# Altium PCB PCB_skinBot_master_v4.PcbDoc
Units mm, origin at the board's own origin, x right, y up, seen from the top; angles counter-clockwise.
Board outline 110.24 x 110.24 mm, 2 copper layers (Top Layer, Bottom Layer); 60 components, 70 nets, 314 pads, 0 vias.
Unrouted connection lines stored in the file: 189.
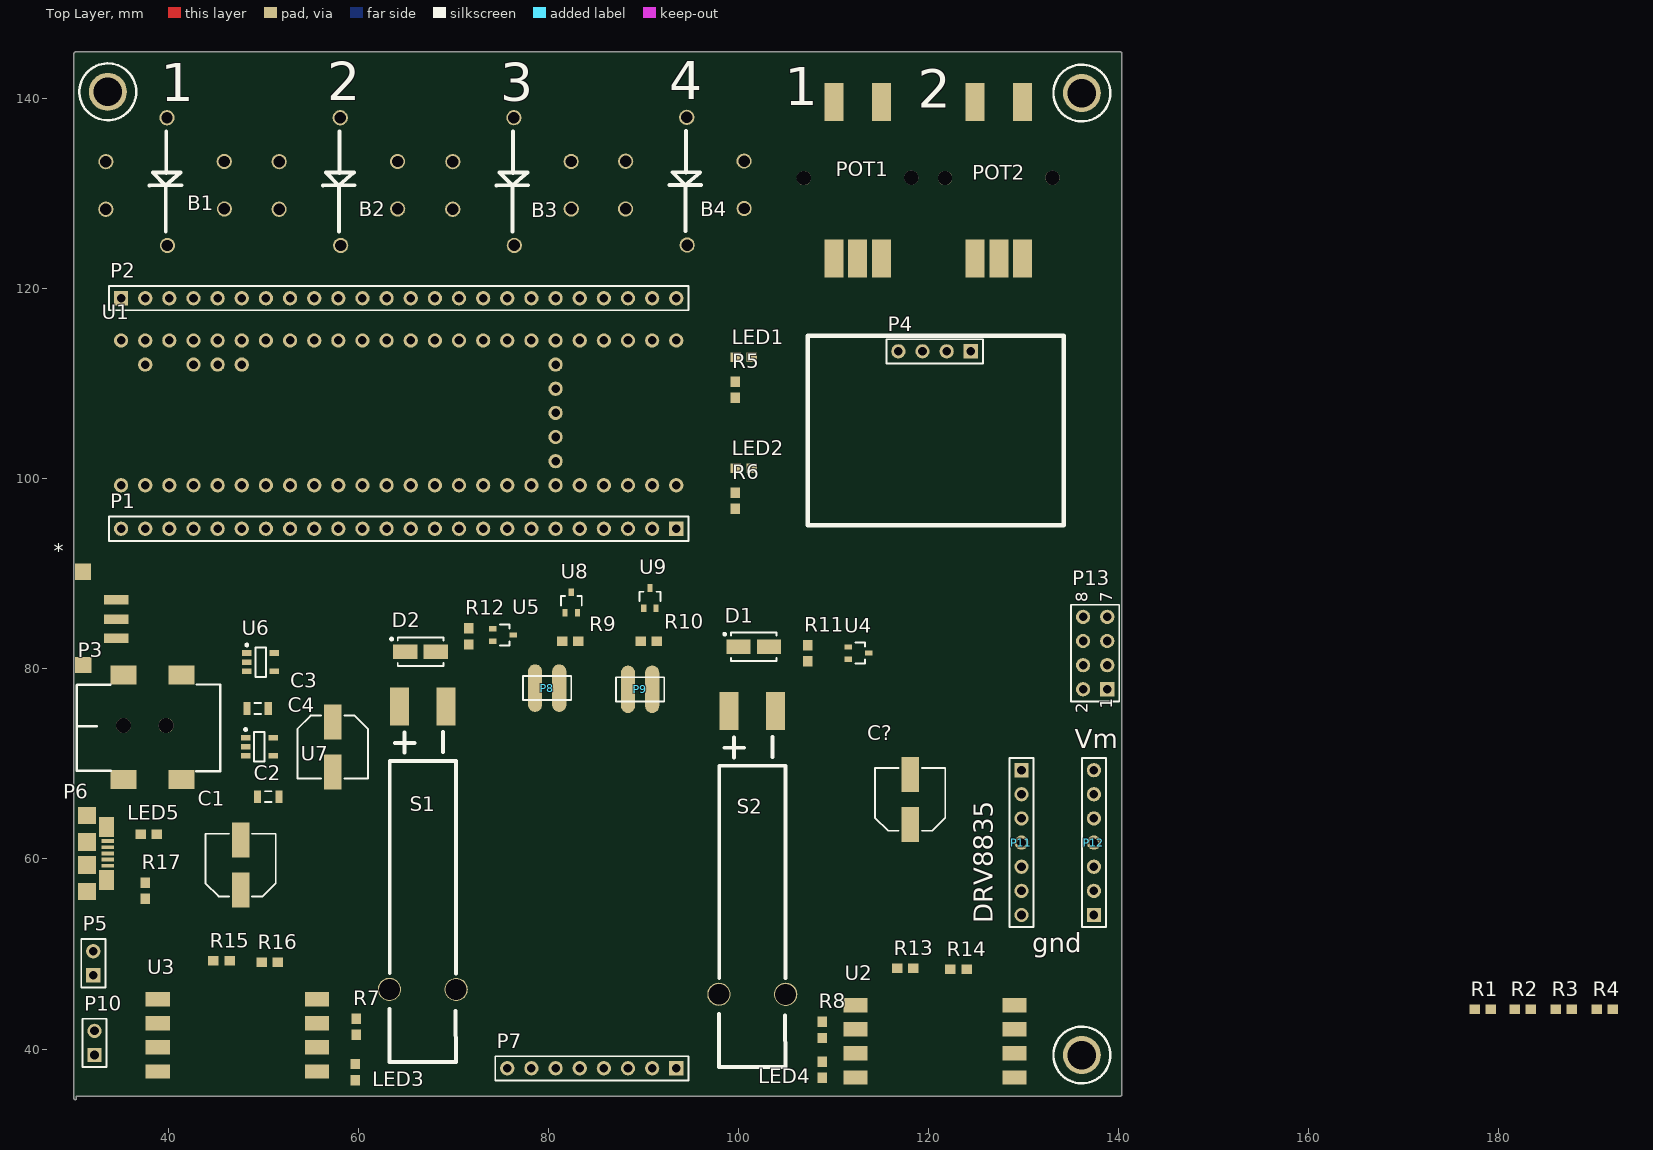
[diagram p0: Top Layer view]
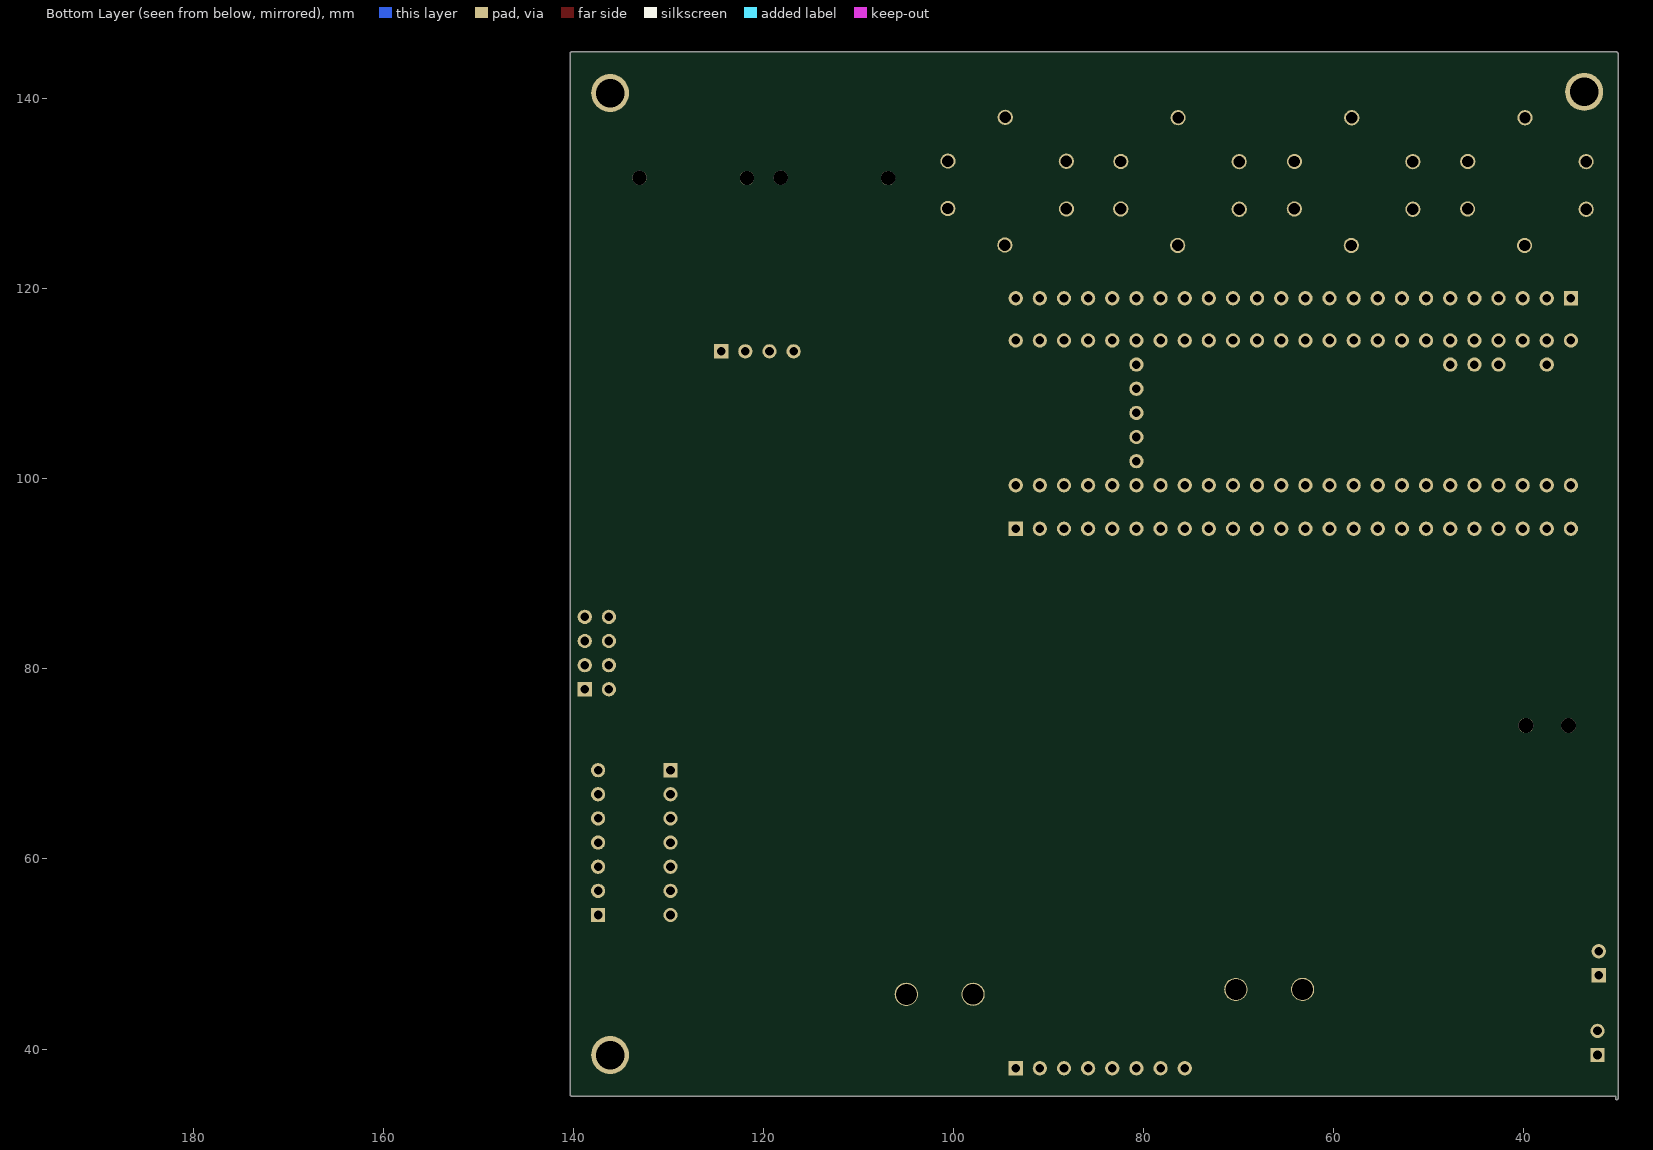
[diagram p1: Bottom Layer view, seen from below]

## Layer stack, top to bottom
Top Solder: solder mask 0.0102, Solder Resist, Dk 3.5
Top Layer: signal copper 0.0356
Dielectric 1: dielectric 0.32, FR-4, Dk 4.8
Bottom Layer: signal copper 0.0356
Bottom Solder: solder mask 0.0102, Solder Resist, Dk 3.5

## Board outline
30.099,34.798 30.099,144.78 cw(c30.226,144.78) 30.226,144.907 140.208,144.907 cw(c140.208,144.78) 140.335,144.78 140.335,35.179 cw(c140.208,35.179) 140.208,35.052 30.353,35.052 30.353,34.798 cw(c30.226,34.798)

## Design rules (kind name [scope] priority, off if disabled: settings)
Clearance [All] p1: gap=0.254 ignorepadtopadclearanceinfootprint=FALSE except(0: Arc-Hole Track-Hole SMDPad-Hole THPad-Hole Via-Hole Fill-Hole Poly-Hole Region-Hole Text-Hole)
PolygonConnect [All] p1: connectstyle=Relief reliefconductorwidth=0.254 reliefentries=4 polygonreliefangle="90 Angle" airgapwidth=0.254
RoutingVias [All] p1: holewidth=0.711 width=1.27 viastyle="Through Hole" minholewidth=0.711 minwidth=1.27 maxholewidth=0.711 maxwidth=1.27
SolderMaskExpansion [All] p1: expansion=0.102
Width [All] p1: maxlimit=0.254 minlimit=0.254 preferedwidth=0.254
30 further rules are at their usual default settings.

## Components (designator, comment, footprint, x,y, rotation, side; value= is the part's Value field where it differs from the comment)
* "ON_OFF_SWITCH" "SS321 Switch" 34.611,87.232 r0 top
B1 "BUTTON 12MM LED LIGHT" "12MM BUTTON LED LIGHT" 38.608,127.635 r180 top
B2 "BUTTON 12MM LED LIGHT" "12MM BUTTON LED LIGHT" 56.841,127.635 r180 top
B3 "BUTTON 12MM LED LIGHT" "12MM BUTTON LED LIGHT" 75.109,127.636 r180 top
B4 "BUTTON 12MM LED LIGHT" "12MM BUTTON LED LIGHT" 93.298,127.675 r180 top
C1 "Electrolytic Cap 100uF smd" "F80 Electrolytic cap" 47.665,59.379 r90 top
C2 "10uF 16V" CAP0805 50.546,66.548 r0 top
C3 "Electrolytic Cap 100uF smd" "F80 Electrolytic cap" 57.277,71.755 r270 top
C4 "10uF 16V" CAP0805 49.403,75.819 r180 top
C? "Electrolytic Cap 100uF smd" "F80 Electrolytic cap" 118.11,66.294 r90 top
D1 "S1A-S1M" "JEDEC DO-214" 101.6,82.296 r0 top
D2 "S1A-S1M" "JEDEC DO-214" 66.548,81.788 r0 top
LED1 "LED BLUE" "0603 LED" 100.584,112.776 r180 top
LED2 "LED RED" "0603 LED" 100.584,101.092 r180 top
LED3 "LED BLUE" "0603 LED" 59.69,37.592 r270 top
LED4 "LED RED" "0603 LED" 108.831,37.789 r90 top
LED5 "LED RED" "0603 LED" 37.973,62.611 r180 top
P1 "Header 24" HDR1X24 93.472,94.742 r180 top
P2 "Header 24" HDR1X24 35.052,118.999 r0 top
P3 "Barrel jack 5.5/2.1" ADC-028-2 32.997,74.245 r0 top
P4 "Header 4" HDR1X4 124.46,113.411 r180 top
P5 "Header 2" HDR1X2#1 32.131,47.752 r90 top
P6 "microB USB Receptacle" "MicroB USB Standarad SMT" 34.885,61.348 r270 top
P7 "Header 8" HDR1X8 93.472,37.973 r180 top
P8 "Header 2" HDR1X2#2 81.153,77.978 r180 top
P9 "Header 2" HDR1X2#2 90.932,77.851 r180 top
P10 "Header 2" HDR1X2#1 32.258,39.37 r90 top
P11 "Header 7" HDR1X7 129.794,69.342 r270 top
P12 "Header 7" HDR1X7 137.414,54.102 r90 top
P13 "Header 4X2" HDR2X4 138.811,77.851 r90 top
POT1 "Potentiometer large" PRS11S 112.014,131.699 r0 top
POT2 "Potentiometer large" PRS11S 126.873,131.699 r0 top
R1 "330" 0603W 178.308,44.196 r0 top
R2 "330" 0603W 182.499,44.196 r0 top
R3 "330" 0603W 186.817,44.196 r0 top
R4 "330" 0603W 191.135,44.196 r0 top
R5 "330" 0603W 99.695,109.347 r90 top
R6 "330" 0603W 99.695,97.663 r90 top
R7 "330" 0603W 59.817,42.355 r270 top
R8 "330" 0603W 108.839,42.037 r270 top
R9 "10K" 0603W 82.296,82.931 r0 top
R10 "10K" 0603W 90.551,82.931 r0 top
R11 "10K" 0603W 107.315,81.661 r270 top
R12 "10K" 0603W 71.628,83.439 r270 top
R13 "10K" 0603W 117.602,48.514 r180 top
R14 "10K" 0603W 123.19,48.387 r180 top
R15 "10K" 0603W 45.593,49.276 r0 top
R16 "10K" 0603W 50.673,49.149 r0 top
R17 "330" 0603W 37.592,56.642 r90 top
S1 "SOLENOID VALVE" S070C-5CG-32 74.422,60.071 r90 top
S2 "SOLENOID VALVE" S070C-5CG-32 109.093,59.563 r90 top
U1 "TEENSY 3.6" "TEENSY 3.6" 50.87,107.463 r90 top
U2 "MPXV6115V" MPXV6115V 121.031,41.021 r180 top
U3 "MPXV6115V" MPXV6115V 47.625,41.656 r180 top
U4 "MOSFET N CHANNEL" SOT323 112.649,81.661 r0 top
U5 "MOSFET N CHANNEL" SOT323 75.252,83.566 r0 top
U6 "3.3V REG" SOT-23-5 48.281,81.661 r0 top
U7 "5V REG" SOT-23-5 48.154,72.766 r0 top
U8 "MOSFET N CHANNEL" SOT323 82.423,86.995 r90 top
U9 "MOSFET N CHANNEL" SOT323 90.693,87.435 r90 top

## Footprints (in the part's own frame and the unit in brackets; to place one, negate y for a bottom-side part, rotate by r counter-clockwise, add the part's x,y. Pads: shape width x height; smd on the part's side, far side on the other; paste and mask are expansions set on the pad)
"12MM BUTTON LED LIGHT" [mm]
  round 1.6 hole 1.2: 1(-7.314,-0.761) 2(5.16,-0.722) 3(-7.304,-5.751) 4(5.152,-5.732) 5(-1.274,-10.357) 6(-1.319,3.084)
  silkscreen extent -2.79,-8.92 0.56,1.6, body extent -7.52,-9.59 5.18,2.41, height 7.68
"0603 LED" [mm]
  rect 1.1x1 smd: 1(0.868,-0.008) 2(-0.832,-0.008)
  body extent -0.8,-0.42 0.8,0.38, height 0.6
0603W [mm]
  rect 1.1x1 smd: 1(-0.825,0) 2(0.875,0)
  body extent -0.8,-0.4 0.8,0.4, height 0.45
ADC-028-2 [mm] "2.1/5.5mm barrel jack"
  rect 2.7x2 smd: 1(2.308,5.112) 1(8.408,5.112) 2(2.308,-5.888) 2(8.408,-5.888)
  round 1.6 hole 1.6: 2(2.309,-0.204) 3(6.794,-0.21)
  silkscreen extent -2.62,-5 12.5,4.11, body extent -2.57,-6.81 12.23,6.02, height 11.5
CAP0805 [mm]
  rect 0.75x1.35 smd: 1(-1.133,0.003) 2(1.117,0.003)
  silkscreen extent -0.36,-0.57 0.34,0.58, body extent -1.01,-0.62 0.99,0.63, height 0.78
"F80 Electrolytic cap" [mm]
  rect 3.7x1.85 smd: 1(-2.653,0.04) 2(2.597,0.04)
  silkscreen extent -3.33,-3.66 3.27,3.74, body extent -3.43,-3.66 3.37,3.74, height 8
HDR1X2#1 [mm] "Connector; Header; 2 Position"
  rect 1.5x1.5 hole 0.9: 1(0,0)
  round 1.5 hole 0.9: 2(2.54,0)
  silkscreen extent -1.27,-1.27 3.81,1.27
HDR1X2#2 [mm] "Connector; Header; 2 Position"
  oval 1.5x5 smd: 1(0,0) 2(2.54,0)
  silkscreen extent -1.27,-1.27 3.81,1.27
HDR1X4 [mm] "Connector; Header; 4 Position"
  rect 1.5x1.5 hole 0.9: 1(0,0)
  round 1.5 hole 0.9: 2(2.54,0) 3(5.08,0) 4(7.62,0)
  silkscreen extent -1.27,-1.27 8.89,1.27
HDR1X7 [mm] "Connector; Header; 7 Position"
  rect 1.5x1.5 hole 0.9: 1(0,0)
  round 1.5 hole 0.9: 2(2.54,0) 3(5.08,0) 4(7.62,0) 5(10.16,0) 6(12.7,0) 7(15.24,0)
  silkscreen extent -1.27,-1.27 16.51,1.27
HDR1X8 [mm] "Connector; Header; 8 Position"
  rect 1.5x1.5 hole 0.9: 1(0,0)
  round 1.5 hole 0.9: 2(2.54,0) 3(5.08,0) 4(7.62,0) 5(10.16,0) 6(12.7,0) 7(15.24,0) 8(17.78,0)
  silkscreen extent -1.27,-1.27 19.05,1.27
HDR1X24 [mm] "Connector; Header; 24 Position"
  rect 1.5x1.5 hole 0.9: 1(0,0)
  round 1.5 hole 0.9: 2(2.54,0) 3(5.08,0) 4(7.62,0) 5(10.16,0) 6(12.7,0) 7(15.24,0) 8(17.78,0) 9(20.32,0) 10(22.86,0) 11(25.4,0) 12(27.94,0) 13(30.48,0) 14(33.02,0) 15(35.56,0) 16(38.1,0) 17(40.64,0) 18(43.18,0) 19(45.72,0) 20(48.26,0) 21(50.8,0) 22(53.34,0) 23(55.88,0) 24(58.42,0)
  silkscreen extent -1.27,-1.27 59.69,1.27
HDR2X4 [mm] "Connector; Header; 4x2 Position"
  rect 1.5x1.5 hole 0.9: 1(0,0)
  round 1.5 hole 0.9: 2(0,2.54) 3(2.54,0) 4(2.54,2.54) 5(5.08,0) 6(5.08,2.54) 7(7.62,0) 8(7.62,2.54)
  silkscreen extent -1.27,-1.27 8.89,3.81
"JEDEC DO-214" [mm] "Diode 2 pin"
  rect 2.55x1.55 smd: 1(-1.585,0.025) 2(1.615,0.025)
  silkscreen extent -3.16,-1.47 2.41,1.53, body extent -2.58,-1.45 2.61,1.5, height 2.2
"MicroB USB Standarad SMT" [mm] "FOR ZX Series Hirose"
  rect 0.4x1.35 smd: 1(-0.533,-1.232) 2(0.119,-1.231) 3(0.769,-1.23) 4(1.419,-1.229) 5(2.069,-1.229)
  rect 1.8x1.9 smd: NC(-3.235,-3.405) NC(4.768,-3.403)
  rect 2.1x1.6 smd: NC(-2.033,-1.357) NC(3.568,-1.353)
  rect 1.9x1.9 smd: NC(-0.432,-3.404) NC(1.968,-3.403)
  body extent -3.25,-6.17 4.66,-0.51, height 2.78
MPXV6115V [mm] "Vacuum pressure sensor -115kPA"
  rect 2.53x1.52 smd: 1(8.712,-3.6) 2(8.712,-1.06) 3(8.712,1.48) 4(8.712,4.02) 5(-8.048,4.02) 6(-8.048,1.48) 7(-8.048,-1.06) 8(-8.048,-3.6)
  body extent -8.87,-5.46 9.33,5.84, height 13
PRS11S [mm] "SMD Potentiometer"
  rect 2x4 smd: 1(-1.956,-8.544) 2(0.544,-8.544) 3(3.044,-8.544) 4(-1.956,7.956) 5(3.044,7.956)
  round 1.5 hole 1.5: 6(-5.121,-0.056) 7(6.178,-0.024)
  body extent -6.01,-9.33 6.99,9.17, height 20
S070C-5CG-32 [mm] "5V Solenoid Valve"
  rect 4x2 smd: 1(15.982,10.098) 2(15.982,5.199)
  round 2.438 hole 2.2: 3(-13.8,11.135) 4(-13.807,4.11)
  silkscreen extent -21.45,4.14 13.28,11.14, body extent -21.45,4.14 23.45,11.14, height 11.5
SOT323 [mm] "Smaller package for SOT23"
  rect 0.8x0.55 smd: 1(-1.075,0.65) 2(-1.075,-0.65) 3(1.075,0)
  silkscreen extent -0.32,-1.1 0.67,1.1, body extent -0.67,-1.1 0.67,1.1, height 1.1
SOT-23-5 [mm] "3D view"
  rect 1x0.6 smd: 1(0,0) 2(0,-0.95) 3(0,-1.9) 4(2.9,-1.9) 5(2.9,0)
  silkscreen extent -0.12,-2.5 2,0.97, body extent -0.25,-2.5 3.15,0.6, height 1.45
"SS321 Switch" [mm] "SPDT Slide Switch"
  rect 2.55x1 smd: 1(-0.067,-3.987) 2(-0.067,-1.986) 3(-0.067,0.017)
  rect 1.7x1.7 smd: 4(-3.54,-6.813) 5(-3.547,2.985)
  body extent -6.86,-7.15 0.53,3.34, height 3.05
"TEENSY 3.6" [mm]
  round 1.5 hole 0.9: 1(-8.149,15.818) 2(-8.149,13.278) 3(-8.149,10.738) 4(-8.149,8.198) 5(-8.149,5.658) 6(-8.149,3.118) 7(-8.149,0.578) 8(-8.149,-1.962) 9(-8.149,-4.502) 10(-8.149,-7.042) 11(-8.149,-9.582) 12(-8.149,-12.122) 13(-8.149,-14.662) 14(-8.149,-17.202) 15(7.091,-17.202) 16(7.091,-14.662) 17(7.091,-12.122) 18(7.091,-9.582) 19(7.091,-7.042) 20(7.091,-4.502) 21(7.091,-1.962) 22(7.091,0.578) 23(7.091,3.118) 24(7.091,5.658) 25(7.091,8.198) 26(7.091,10.738) 27(7.091,13.278) 28(7.091,15.818) 29(-5.609,-29.902) 30(-3.069,-29.902) 31(-0.529,-29.902) 32(2.011,-29.902) 33(4.551,-29.902) 34(4.551,13.278) 35(4.551,8.198) 36(4.551,5.658) 37(4.551,3.118) 38(-8.149,-19.742) 39(-8.149,-22.282) 40(-8.149,-24.822) 41(-8.149,-27.362) 42(-8.149,-29.902) 43(-8.149,-32.442) 44(-8.149,-34.982) 45(-8.149,-37.522) 46(-8.149,-40.062) 47(-8.149,-42.602) 48(7.091,-19.742) 49(7.091,-22.282) 50(7.091,-24.822) 51(7.091,-27.362) 52(7.091,-29.902) 53(7.091,-32.442) 54(7.091,-34.982) 55(7.091,-37.522) 56(7.091,-40.062) 57(7.091,-42.602)
  body extent -9.34,-43.87 8.53,18.09, height 7.29

## Part data
*: "SPDT SMD Side Switch", digikey number=563-1102-1-ND, Sparkfun#=COM-00597
C1 C3: "100uF 25 VSMD", digikey part number=565-2549-1-ND, manufacturer="United Chemi-Con", manufacturer part number=EMZA250ADA101MF80G, Supplier Part Number 1=565-2549-6-ND, Supplier 1=Digikey
C2 C4: library part "Polarized Cap"
C?: "100uF 25 VSMD", digikey part number=565-2549-1-ND, manufacturer="United Chemi-Con", manufacturer part number=EMZA250ADA101MF80G
D1 D2: "General purpose diode 50V 1A SMA", Supplier Part Number 1=ES1AFSCT-ND, Supplier 1=Digikey
LED1 LED3: library part LED, "LED SMD 1206/0603", Supplier Part Number 1=LNJ947W8CRACT-ND, Supplier 1=Digikey
LED2 LED4 LED5: library part LED, "LED SMD 1206/0603", Supplier Part Number 1=LNJ247W82RACT-ND, Supplier 1=Digikey
P1 P2: "Header, 24-Pin", LatestRevisionDate=17-Jul-2002, LatestRevisionNote="Re-released for DXP Platform.", Publisher="Altium Limited"
P3: sparkfun part number=12748
P4: "Header, 4-Pin", LatestRevisionDate=17-Jul-2002, LatestRevisionNote="Re-released for DXP Platform.", Publisher="Altium Limited"
P5 P8 P9 P10: "Header, 2-Pin", LatestRevisionDate=17-Jul-2002, LatestRevisionNote="Re-released for DXP Platform.", Publisher="Altium Limited"
P6: digikey part number 2=609-4613-1-ND, manufacturer=ZX62-B-5PA(11), Digikey=H11634CT-ND
P7: "Header, 8-Pin", LatestRevisionDate=17-Jul-2002, LatestRevisionNote="Re-released for DXP Platform.", Publisher="Altium Limited"
P11 P12: "Header, 7-Pin", LatestRevisionDate=17-Jul-2002, LatestRevisionNote="Re-released for DXP Platform.", Publisher="Altium Limited"
P13: "Header, 4-Pin, Dual row", LatestRevisionDate=17-Jul-2002, LatestRevisionNote="Re-released for DXP Platform.", Publisher="Altium Limited"
POT1 POT2: "SMD Large pot for audio", Supplier Part Number 1=PRS11S-N20F-103B1-ND, Supplier 1=Digikey
R1 R2 R3 R4 R5 R6 R7 R8 R17: library part Resistor, Supplier Part Number 1=311-330JRCT-ND, digikey number=RMCF0603FT10K0CT-ND, Supplier 1=Digikey
R9 R10 R11 R12 R13 R14 R15 R16: library part Resistor, Supplier Part Number 1=311-10KJRCT-ND, Supplier 1=Digikey
U2 U3: "Vacuum pressure sensor -115kPa", Supplier Part Number 1=MPXV6115VC6U-ND, Supplier 1=Digikey
U4 U5 U8 U9: digikey part number=1727-4793-1-ND
U6 U7: library part MIC5205_VOLTAGE_REG, "5V LDO SMD", digikey number=576-2770-1-ND

## Free pads (board coordinates)
  round 4 hole 3: 11(33.655,140.716) 11(136.144,39.37) 11(136.144,140.589)

## Nets (pads, with @x,y where several pads share a name; then routed paths per layer and width w, separated by ;. In a path a pad name is that pad's centre, name@x,y a point inside that pad or via, vN(x,y) a via of type N, cw(c..) or ccw(c..) an arc to the next point about the centre after c; other vN are vias at no path point)
3.3V_MCU: C?.1 P2.3 P4.4 P6.1 P13.2 POT1.1 POT2.1 U1.26
3.3V_MOTOR: C1.1 LED5.1 P7.8 P8.1 P9.1 U6.5
5V: C3.1 D1.1 D2.1 P10.2 S1.1 S2.1 U2.2 U3.2 U7.5
9V: *.2 P3.2 P5.2
BUTTON_1: B1.1 B1.3 P2.7 U1.22
BUTTON_1_LED: B1.5 P1.21 U1.4
BUTTON_2: B2.1 B2.3 P2.12 U1.17
BUTTON_2_LED: B2.5 P1.20 U1.5
BUTTON_3: B3.1 B3.3 P1.2 U1.46
BUTTON_3_LED: B3.5 P1.19 U1.6
BUTTON_4: B4.1 B4.3 P2.13 U1.16
BUTTON_4_LED: B4.5 P1.17 U1.8
CE: P1.13 P13.3 U1.12
CSN: P1.14 P13.4 U1.11
GND: B1.2 B1.4 B2.2 B2.4 B3.2 B3.4 B4.2 B4.4 C1.2 C2.2 C3.2 C4.2 C?.2 P1.24 P2.15 P3.1 P4.3 P5.1 P6.5 P7.7 P10.1 P11.7 P12.1 P13.1 POT1.3 POT2.3 R1.2 R2.2 R3.2 R4.2 R5.1 R6.1 R7.1 R8.1 R9.2 R10.2 R11.2 R12.2 R14.2 R16.2 R17.1 U1.1 U1.31 U1.48 U2.3 U3.3 U4.2 U5.2 U6.2 U7.2 U8.2 U9.2
IRQ: P13.8
LED_1: LED1.1 P1.9 U1.39
LED_2: LED2.1 P1.8 U1.40
LED_L: LED3.1 P1.7 U1.41
LED_R: LED4.1 P1.6 U1.42
M+: P7.5 P12.3
M-: P7.6 P12.2
MISO: P1.11 P13.7 U1.14
MODE_MOTOR: P1.3 P11.1 U1.45
MOSI: P1.12 P13.6 U1.13
MOTOR_DIR: P1.5 P11.2 U1.43
MOTOR_PWN: P1.4 P11.3 U1.44
NetB1_6: B1.6 R1.1
NetB2_6: B2.6 R2.1
NetB3_6: B3.6 R3.1
NetB4_6: B4.6 R4.1
NetD1_2: D1.2 S2.2 U4.3
NetD2_2: D2.2 S1.2 U5.3
NetLED1_2: LED1.2 R5.2
NetLED2_2: LED2.2 R6.2
NetLED3_2: LED3.2 R7.2
NetLED4_2: LED4.2 R8.2
NetLED5_2: LED5.2 R17.2
NetP1_10: P1.10 U1.38
NetP1_18: P1.18 U1.7
NetP1_22: P1.22 U1.3
NetP1_23: P1.23 U1.2
NetP2_1: P2.1 U1.28
NetP2_2: P2.2 U1.27
NetP2_10: P2.10 U1.19
NetP2_14: P2.14 U1.15
NetP2_16: P2.16 U1.49
NetP2_17: P2.17 U1.50
NetP2_18: P2.18 U1.51
NetP8_2: P8.2 U8.3
NetP9_2: P9.2 U9.3
NetR13_1: R13.1 U2.4
NetR15_1: R15.1 U3.4
OLED_RST: P2.11 U1.18
POT_1: P2.5 POT1.2 U1.24
POT_2: P2.6 POT2.2 U1.23
PRESSURE_LEFT: P2.4 U1.25
PRESSURE_RIGHT: P1.1 R13.2 R14.1 R15.2 R16.1 U1.47
PUMP_L_C: P1.15 R9.1 U1.10 U8.1
PUMP_R_C: P1.16 R10.1 U1.9 U9.1
SCK: P13.5
SCL: P2.8 P4.2 U1.21
SDA: P2.9 P4.1 U1.20
SERVO_H_L: P2.22 P7.1 U1.55
SERVO_H_R: P2.20 P7.3 U1.53
SERVO_V_L: P2.21 P7.2 U1.54
SERVO_V_R: P2.19 P7.4 U1.52
SOLENOID_L: P2.23 R12.1 U1.56 U5.1
SOLENOID_R: P2.24 R11.1 U1.57 U4.1
VRAW: *.3 C2.1 C4.1 U6.1 U6.3 U7.1 U7.3
pads on no net: *.1 *.4 *.5 P3.3 P6.2 P6.3 P6.4 P6.NC P11.4 P11.5 P11.6 P12.4 P12.5 P12.6 P12.7 POT1.4 POT1.5 POT1.6 POT1.7 POT2.4 POT2.5 POT2.6 POT2.7 S1.3 S1.4 S2.3 S2.4 U1.29 U1.30 U1.32 U1.33 U1.34 U1.35 U1.36 U1.37 U2.1 U2.5 U2.6 U2.7 U2.8 U3.1 U3.5 U3.6 U3.7 U3.8 U6.4 U7.4

## Silkscreen, mask and mechanical layers (free items; w line width, h text height)
Top Overlay:
  circle w0.254: c136.144,39.37 r2.989
  circle w0.254: c33.655,140.716 r2.989
  circle w0.254: c136.144,140.589 r2.989
  lines w0.5: 107.315,95.123 107.315,115.062 134.239,115.062 134.239,95.123 107.315,95.123
  text "4" at 92.71,139.954 h4
  text "2" at 56.769,139.827 h4
  text "1" at 39.243,139.7 h4
  text "3" at 74.93,139.7 h4
  text "1" at 104.902,139.319 h4
  text "2" at 118.872,139.065 h4
  text "Vm" at 135.382,71.628 h2
  text "DRV8835" at 126.746,53.213 h2 r90
  text "gnd" at 130.937,50.165 h2
Mechanical 2:
  lines w0.254: 30.226,34.798 30.226,144.78 140.208,144.78 140.208,35.179 30.226,35.179

## Text inside footprints (layer, text, board x,y; h text height)
P13: Top Overlay "2" at 136.779,75.311 h1.27 r90; Top Overlay "1" at 139.319,75.819 h1.27 r90; Top Overlay "7" at 139.319,86.995 h1.27 r90; Top Overlay "8" at 136.779,86.995 h1.27 r90